# Altium PCB PCB2.PcbDoc
Units mil, origin at the board's own origin, x right, y up, seen from the top; angles counter-clockwise.
Board outline 1875 x 2875 mil, 2 copper layers (Top Layer, Bottom Layer); 23 components, 19 nets, 92 pads, 0 vias.
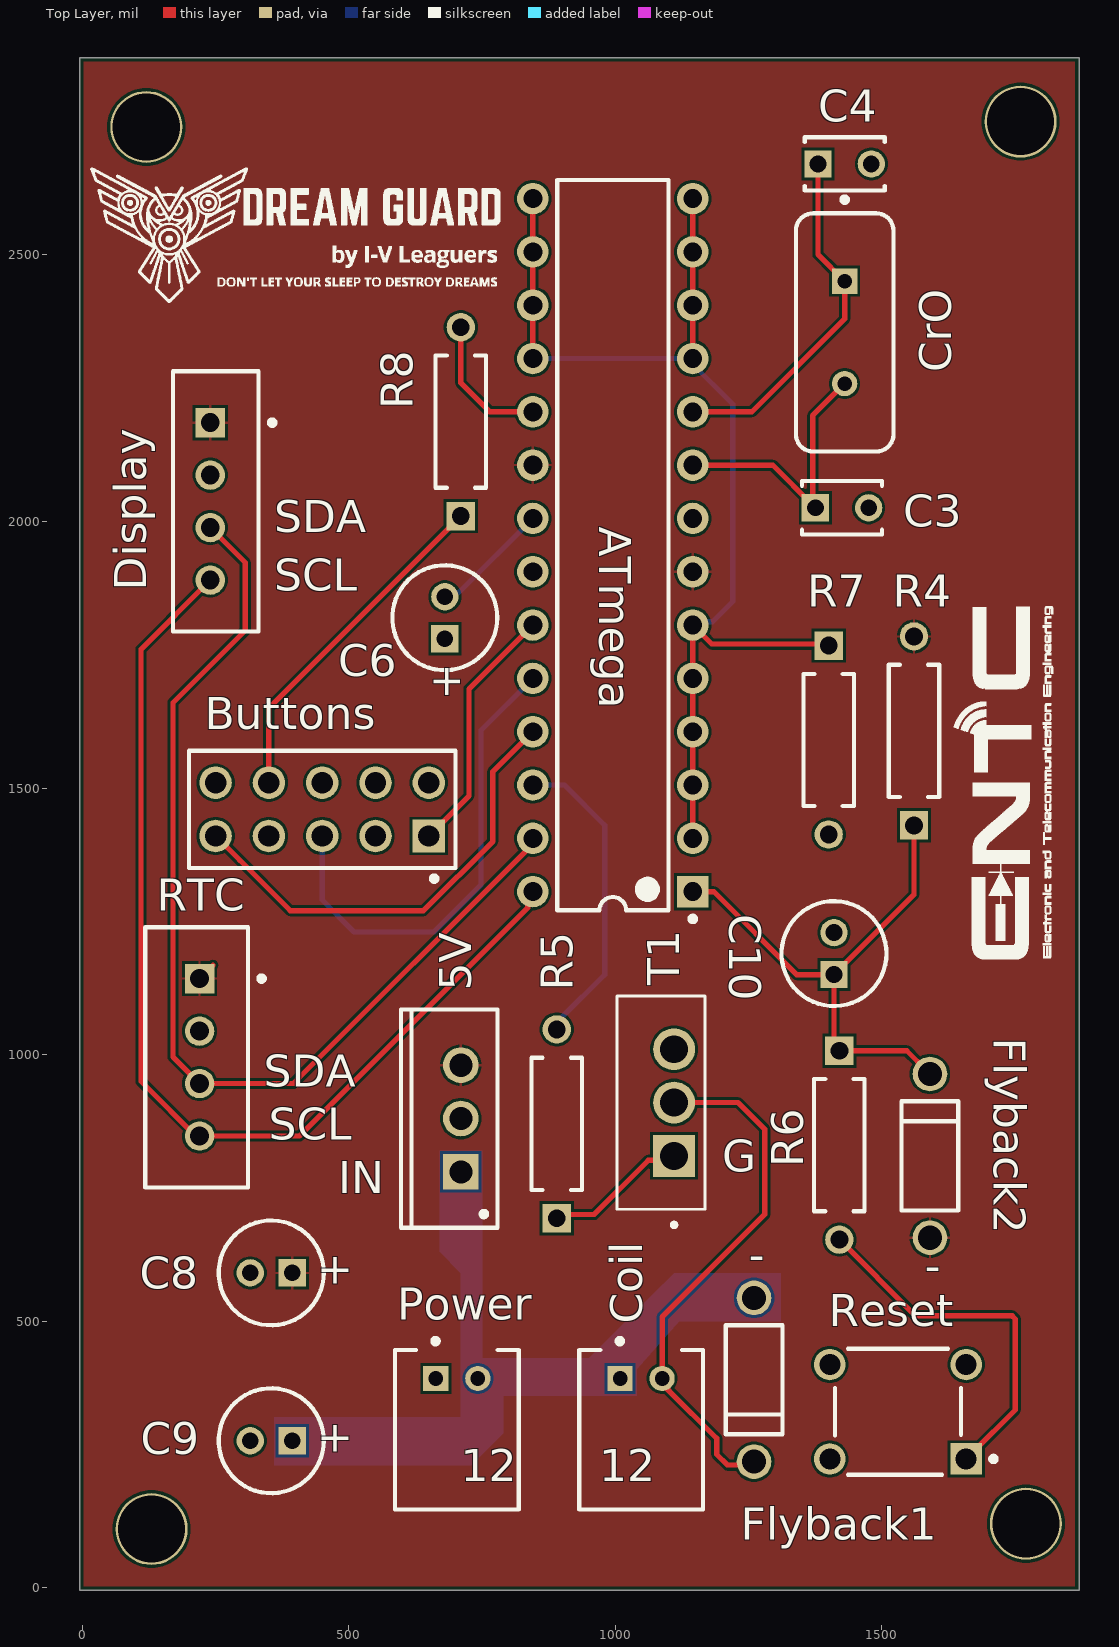
[diagram p0: Top Layer view]
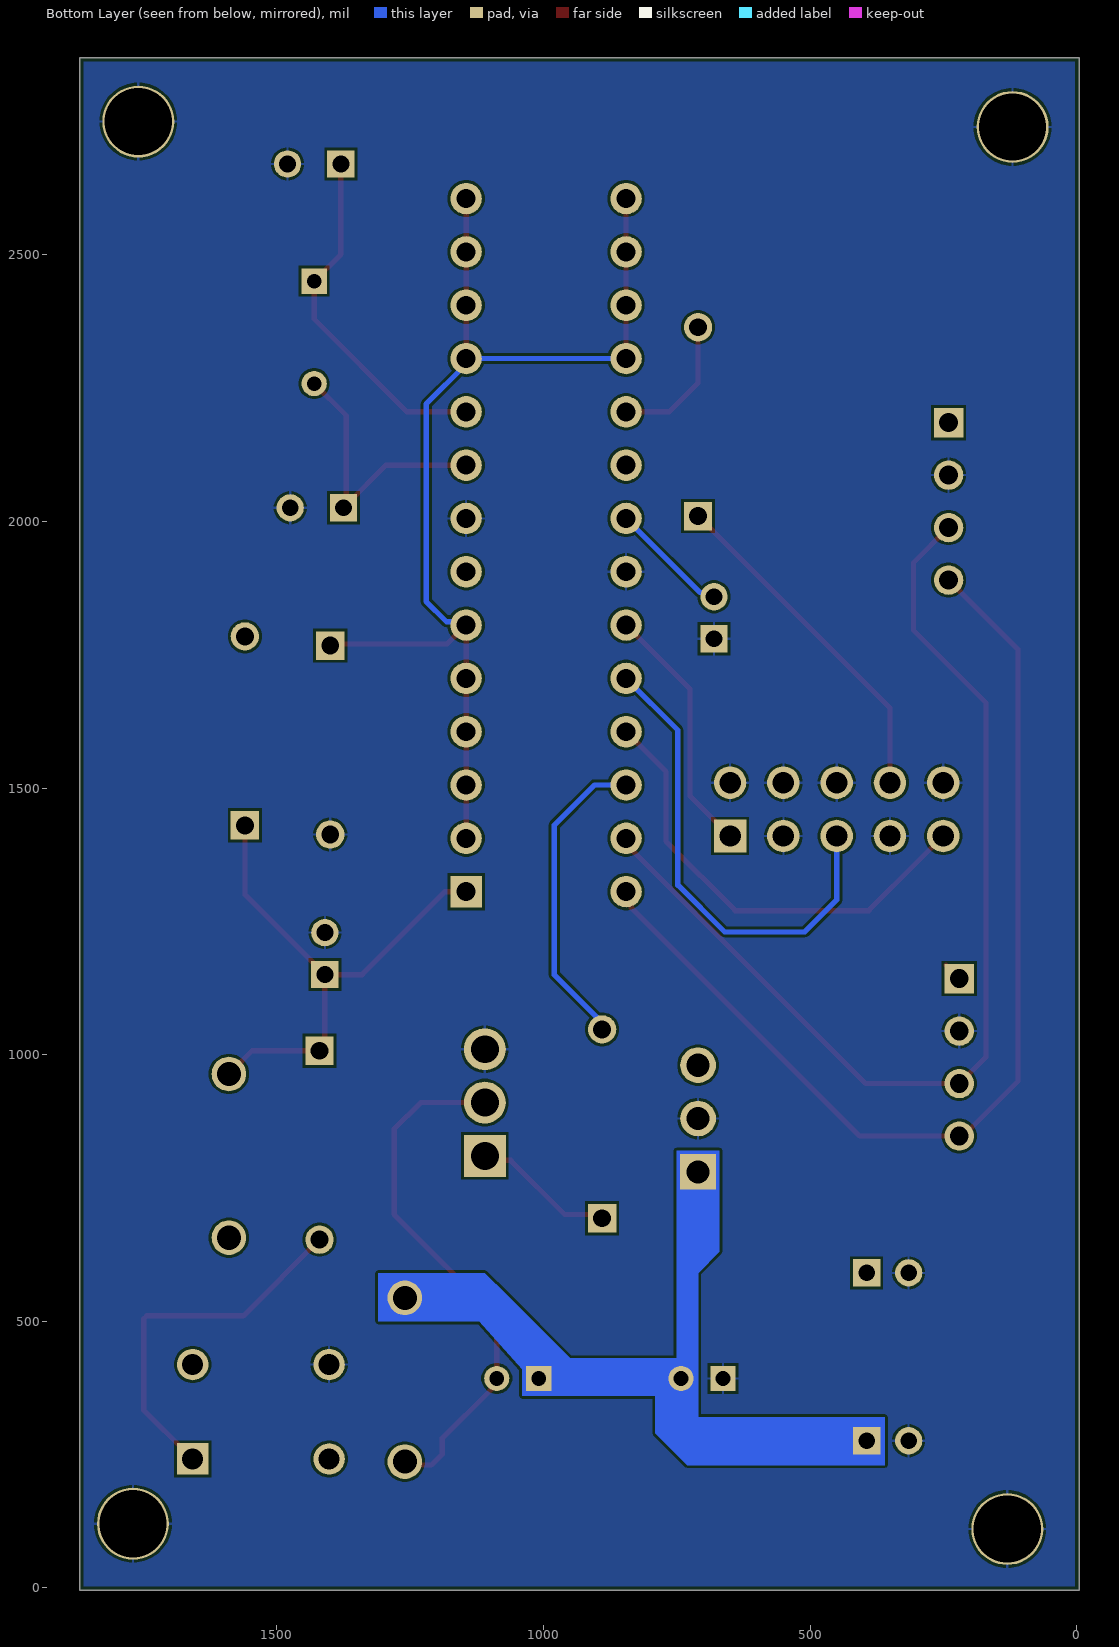
[diagram p1: Bottom Layer view, seen from below]

## Layer stack, top to bottom
Top Solder: solder mask 0.4, Solder Resist, Dk 3.5
Top Layer: signal copper 1.4
Dielectric 1: dielectric 12.6, FR-4, Dk 4.8
Bottom Layer: signal copper 1.4
Bottom Solder: solder mask 0.4, Solder Resist, Dk 3.5

## Board outline
-5,-5 1870,-5 1870,2870 -5,2870

## Design rules (kind name [scope] priority, off if disabled: settings)
BoardOutlineClearance [All] p1: gap=7.87 ignorepadtopadclearanceinfootprint=FALSE
Clearance [All] p1: gap=5 ignorepadtopadclearanceinfootprint=FALSE except(9.84: Arc-Hole Track-Hole SMDPad-Hole THPad-Hole Via-Hole Fill-Hole Poly-Hole Region-Hole Text-Hole)
ComponentClearance [All] p1: gap=5 collisioncheckmode=3 verticalgap=5 showdistances=TRUE
DiffPairsRouting [All] p1: maxlimit=10 minlimit=5 mostfreqgap=5 toplayer_minwidth=5 toplayer_maxwidth=1000 toplayer_prefwidth=5 bottomlayer_minwidth=5 bottomlayer_maxwidth=1000 bottomlayer_prefwidth=5 maxuncoupledlength=500
Height [All] p1: minheight=0 maxheight=71497.94 prefheight=500
HoleSize [All] p1: absolutevalues=TRUE maxlimit=248.03 minlimit=11.81 maxpercent=80.000 minpercent=20.000
HoleToHoleClearance [All] p1: gap=9.84 allowstackedmicrovias=FALSE
MinimumAnnularRing [All] p1: minimumring=3
MinimumSolderMaskSliver [All] p1: minsoldermaskwidth=0
PlaneClearance [All] p1: clearance=5
PlaneConnect PlaneConnectPowerPads [InPadClass('PowerPads')] p1: planeconnectstyle=Direct reliefexpansion=20 reliefentries=4 reliefconductorwidth=10 reliefairgap=10
PlaneConnect [All] p2: pad.planeconnectstyle=Relief pad.reliefexpansion=11.81 pad.reliefentries=4 pad.reliefconductorwidth=5 pad.reliefairgap=5 via.planeconnectstyle=Direct via.reliefexpansion=11.81 via.reliefentries=4 via.reliefconductorwidth=5 via.reliefairgap=5
PolygonConnect PolygonConnectPowerPads [All vs (InPadClass('PowerPads'))] p1: connectstyle=Direct reliefconductorwidth=10 reliefentries=4 polygonreliefangle="90 Angle" airgapwidth=10
PolygonConnect [All] p2: thpad.connectstyle=Relief thpad.reliefconductorwidth=5 thpad.reliefentries=4 thpad.polygonreliefangle="90 Angle" thpad.airgapwidth=5 smdpad.connectstyle=Relief smdpad.reliefconductorwidth=5 smdpad.reliefentries=4 smdpad.polygonreliefangle="90 Angle" smdpad.airgapwidth=5 via.connectstyle=Direct via.reliefconductorwidth=5 via.reliefentries=4 via.polygonreliefangle="90 Angle" via.airgapwidth=5
RoutingVias [All] p1: holewidth=11.81 width=23.62 viastyle="Through Hole" minholewidth=11.81 minwidth=23.62 maxholewidth=23.62 maxwidth=259.84
SilkToSilkClearance [All] p1: silktosilkclearance=0
SilkToSolderMaskClearance [IsPad] p1: minsilkscreentomaskgap=5 clearancetoexposedcopper=TRUE
SolderMaskExpansion [All] p1: expansion=2.95 istentingtop=FALSE
Width "Power 12" [InNet('+12')] p1: maxlimit=30 minlimit=10 preferedwidth=25
Width GND [InNet('GND')] p2: maxlimit=30 minlimit=10 preferedwidth=25
Width "Power 5" [InNet('+5')] p3: maxlimit=30 minlimit=10 preferedwidth=25
Width [All] p4: maxlimit=19.68 minlimit=10 preferedwidth=10 minimp=50.000000 maximp=50.000000 favimp=50.000000
20 further rules are at their usual default settings.

## Components (designator, comment, footprint, x,y, rotation, side; value= is the part's Value field where it differs from the comment)
5V "L7805CV" TO220 710,880 r90 top
ATmega "ATMEGA328P-PU" ATML-28P3 995.04,1955.63 r180 top
Buttons "68021-210HLF" FCI-68021-210HLF-10_V 450,1460 r180 top
C3 "22pF" KEMT-C315-THT-2 1425.04,2025.63 r0 top
C4 "22pF" KEMT-C315-THT-2 1430.04,2670.63 r0 top
C6 "ECA1HM100" CAPPR55-200-1100X500X1200 680,1819.37 r90 top value=10µF
C8 "ECA1HM100" CAPPR55-200-1100X500X1200 354.33,590.55 r180 top value=10µF
C9 "ECA1HM100" CAPPR55-200-1100X500X1200 354.33,275.59 r180 top value=10µF
C10 "ECA1HM100" CAPPR55-200-1100X500X1200 1410,1189.37 r90 top value=10µF
Coil "S2B-PH-K-S(LF)(SN)" JST-S2B-PH-K-S_V 1048.24,296.03 r0 top
CrO "FOXSLF/160-20" FOX-FOXSLF160-20 1430.04,2354.57 r270 top
Display "S4B-XH-A(LF)(SN)" JST-S4B-XH-A(LF)(SN)_V 240,2037.64 r270 top
Flyback1 "1N4007" FAIR-DO-41-2 1260,390 r270 top
Flyback2 "1N4007" FAIR-DO-41-2 1590,810 r90 top
Power "S2B-PH-K-S(LF)(SN)" JST-S2B-PH-K-S_V 702.5,296.03 r0 top
R4 "MFR-25FBF52-10K" RESA60-630X240 1560,1607.17 r90 top value=10k
R5 "MFR-25FBF52-1K" RESA60-630X240 890,870 r90 top value=1k
R6 "MFR-25FBF52-221R" RESA60-630X240 1420,830 r270 top value=221
R7 "MFR-25FBF52-10K" RESA60-630X240 1400,1590 r270 top value=10k
R8 "MFR-25FBF52-221R" RESA60-630X240 710,2187.17 r90 top value=221
Reset "B3F-1000" OMRON-B3F-1000-4_V 1530,330 r180 top
RTC "S4B-XH-A(LF)(SN)" JST-S4B-XH-A(LF)(SN)_V 220.04,994.84 r270 top
T1 "IRFZ44N" TO254P1016X419X2286-3 1110,910 r90 top

## Footprints (in the part's own frame and the unit in brackets; to place one, negate y for a bottom-side part, rotate by r counter-clockwise, add the part's x,y. Pads: shape width x height; smd on the part's side, far side on the other; paste and mask are expansions set on the pad)
ATML-28P3 [mm] "DIP, 28-Leads, Body 34.8x7.2mm, Pitch 2.54mm"
  rect 1.5x1.5 hole 0.9: 1(-3.81,16.51)
  round 1.5 hole 0.9: 2(-3.81,13.97) 3(-3.81,11.43) 4(-3.81,8.89) 5(-3.81,6.35) 6(-3.81,3.81) 7(-3.81,1.27) 8(-3.81,-1.27) 9(-3.81,-3.81) 10(-3.81,-6.35) 11(-3.81,-8.89) 12(-3.81,-11.43) 13(-3.81,-13.97) 14(-3.81,-16.51) 15(3.81,-16.51) 16(3.81,-13.97) 17(3.81,-11.43) 18(3.81,-8.89) 19(3.81,-6.35) 20(3.81,-3.81) 21(3.81,-1.27) 22(3.81,1.27) 23(3.81,3.81) 24(3.81,6.35) 25(3.81,8.89) 26(3.81,11.43) 27(3.81,13.97) 28(3.81,16.51)
  silkscreen extent -3.94,-17.4 2.65,17.93, body extent -3.95,-17.4 3.95,17.4, height 4.58
CAPPR55-200-1100X500X1200 [mm] "THD, 2-Leads, Dia 5mm, Pin Spacing 2mm"
  rect 1.3x1.3 hole 0.8: 1(-1,0)
  round 1.3 hole 0.8: 2(1,0)
  silkscreen extent -2.5,-2.5 2.5,2.5, body extent -2.5,-2.5 2.45,2.5, height 12
FAIR-DO-41-2 [mm] "THD, 2-Leads, Body 5.2x2.72mm, Pin Spacing 7.8mm"
  round 1.65 hole 1.15: 1(-3.9,0) 2(3.9,0)
  silkscreen extent -2.6,-1.35 2.6,1.35, body extent -4.29,-1.17 4.29,1.17, height 2.35
FCI-68021-210HLF-10_V [mm] "THD, 10-Leads, Body 12.7x2.54mm, Pitch 2.54mm"
  rect 1.55x1.55 hole 1.02: 1(-5.08,1.27)
  round 1.55 hole 1.02: 2(-2.54,1.27) 3(0,1.27) 4(2.54,1.27) 5(5.08,1.27) 6(5.08,-1.27) 7(2.54,-1.27) 8(0,-1.27) 9(-2.54,-1.27) 10(-5.08,-1.27)
  silkscreen extent -6.35,-2.79 6.35,3.43, body extent -6.32,-2.79 6.32,2.79, height 0.25
FOX-FOXSLF160-20 [mm] "THD, 2-Leads, Body 11.35x4.65mm"
  rect 1.2x1.2 hole 0.7: 1(-2.44,0)
  round 1.2 hole 0.7: 2(2.44,0)
  silkscreen extent -6.45,-2.33 5.68,2.33, body extent -5.67,-2.32 5.68,2.33, height 3.6
JST-S2B-PH-K-S_V [mm] "THD, 2-Leads, Body 7.6x5.9mm, Pitch 2mm"
  rect 1.2x1.2 hole 0.7: 1(-1,2.45)
  round 1.2 hole 0.7: 2(1,2.45)
  silkscreen extent -2.95,-3.8 2.95,4.35, body extent -2.95,-3.8 2.95,3.8, height 4.8
JST-S4B-XH-A(LF)(SN)_V [mm] "Header, 4-Leads, Body 12.4x11.5mm, Pitch 2.5mm"
  rect 1.4x1.4 hole 0.9: 1(-3.75,0)
  round 1.4 hole 0.9: 2(-1.25,0) 3(1.25,0) 4(3.75,0)
  silkscreen extent -6.2,-1.78 6.2,3.08, body extent -6.2,-1.78 6.2,2.3, height 0.25
KEMT-C315-THT-2 [mm] "THD, 2-Leads, Body 3.81x2.54mm"
  rect 1.3x1.3 hole 0.8: 1(-1.27,0)
  round 1.3 hole 0.8: 2(1.27,0)
  silkscreen extent -1.91,-1.27 1.91,1.27, body extent -1.91,-1.27 1.91,1.27, height 4.66
OMRON-B3F-1000-4_V [mm] "TH, 4-Leads, Body 6x6mm"
  rect 1.5x1.5 hole 1 paste+0: 1(-3.25,2.25)
  round 1.5 hole 1 paste+0: 2(3.25,2.25) 4(3.25,-2.25)
  round 1.5 hole 1 paste+0 mask+0.102: 3(-3.25,-2.25)
  silkscreen extent -4.68,-3 3,3, body extent -3.4,-3 3.4,3, height 4.5
RESA60-630X240 [mm] "Axial Resistor, 2-Leads, Dia 2.4mm, Body Length 6.3mm"
  rect 1.35x1.35 hole 0.85: 1(-4.5,0)
  round 1.35 hole 0.85: 2(4.5,0)
  silkscreen extent -3.15,-1.2 3.15,1.2, body extent -4.77,-1.19 4.77,1.2, height 2.4
TO220 [mm] "TO, Thru-Hole, Vertical, Heatsink Mounted; 3 In-Line Leads; Pitch 2.54 mm"
  rect 1.7x1.7 hole 1.1: 1(-2.54,0)
  round 1.7 hole 1.1: 2(0,0) 3(2.54,0)
  silkscreen extent -5.2,-1.75 5.2,2.85, body extent -5.25,-1.8 5.25,2.9, height 19.7
TO254P1016X419X2286-3 [mm]
  rect 1.995x1.995 / inner round 1.995 / far side rect 1.995x1.995 hole 1.33: 1(-2.54,0)
  round 1.995 hole 1.33: 2(0,0) 3(2.54,0)
  silkscreen extent -5.93,-1.48 5.08,2.72, body extent -5.08,-1.47 5.08,2.72, height 22.86

## Part data
5V: library part CMP-019-00018-3, "Positive Voltage Regulator IC, 1.5 A, 5 V, 0 to 125 degC, 3-Pin TO-220, RoHS, Tube", Case/Package=TO-220, Dropout Voltage=2V, Manufacturer=STMicroelectronics, Max Input Voltage=35V, Max Operating Temperature=125°C, Max Ouput Current=1.5A, Max Supply Voltage=20V, Min Input Voltage=7V, Min Operating Temperature=0°C, Min Supply Voltage=8V, Nominal Output Voltage=5V, Package Quantity=50, Datasheet URL=https://datasheet.ciiva.com/15111/getdatasheetpartid-44136-15111027.pdf, Datasheet Version="Rev 30, 09/2012", Manufacturer URL=http://www.st.com/, Mounting Technology=TH, Output Current=1.5A, Output Voltage=5V, Outputs=1, Packaging=Rail/Tube, Pins=3, RoHS Compliant=True
ATmega: library part CMP-020-00004-3, "8-Bit Microcontroller with 32 KBytes In-System Programmable Flash, 23 I/Os, -40 to 85 degC, 28-Pin PDIP (28P3), RoHS, Tube", Case/Package=DIP, Manufacturer=Atmel, Max Clock Frequency=20MHz, Max Operating Temperature=85°C, Max Supply Voltage=5.5V, Min Operating Temperature=-40°C, Min Supply Voltage=1.8V, Package Description="28-Pin Plastic Dual Inline Package, Body 34.671 x 7.3025 mm, Pitch 2.54 mm", Package Quantity=14, Package Reference=28P3, Package Version="Rev. B, 09/2001", Datasheet URL=http://www.atmel.com/images/Atmel-8271-8-bit-AVR-Microcontroller-ATmega48A-48PA-88A-88PA-168A-168PA-328-328P_datasheet_Complete.pdf, Datasheet Version="Rev. 8271J, 11/2015", Density=32KB, Ethernet Channels=0, I/Os=23, Interface=USART, Manufacturer URL=http://www.atmel.com/, Mounting Technology=TH, Package URL=http://www.atmel.com/images/Atmel-8271-8-bit-AVR-Microcontroller-ATmega48A-48PA-88A-88PA-168A-168PA-328-328P_datasheet_Complete.pdf, Packaging=Rail/Tube, Pins=28, RAM Size=2KB, RoHS Compliant=True
Buttons: library part CMP-002-00020-2, "Male Header, Pitch 2.54 mm, 2 x 5 Position, Height 4.83 mm, Tail Length 3.05 mm, Bulk", Case/Package=68021-210HLF-10, Manufacturer="FCI Electronics", Package Description="Male Header, Pitch 2.54 mm, 2 x 5 Position, Height 4.83 mm, Tail Length 3.05 mm", Connector Type=Header, Datasheet URL=http://portal.fciconnect.com/Comergent//fci/drawing/68020.pdf, Datasheet Version="Rev. BM, 04/2015", Gender=Male, Manufacturer URL=http://portal.fciconnect.com/, Mounting Technology=TH, Package Reference=68021-210HLF-10, RoHS Compliant=Unknown
C3 C4: library part CMP-1664-00008-1, "Capacitor, Ceramic, 22 pF, +/-10 %, 100 V, -55 to 125 degC, 2-Pin THD, RoHS, Bulk", Case\Package=TO-220, Max Input Voltage="40 V", Max Operating Temperature="125 degC", Max Ouput Current="1.5 A", Min Input Voltage="4.2 V", Min Operating Temperature="0 degC", Output Voltage="1.2 V", Package Quantity=50, ComponentLink1Description="Manufacturer URL", ComponentLink1URL=http://www.kemet.com/, ComponentLink2Description=Datasheet, ComponentLink2URL=http://capacitoredge.kemet.com/capedge2/DataSheet/Datasheet-C315C220K1G5TA.pdf?pn=C315C220K1G5TA{BULK}, DatasheetVersion=Aug-16, Height="9.28 mm", Length="10.28 mm", Mount="Through Hole", Output Current="1.5 A", Outputs=1, PackageDescription="2-Pin Through Hole Device, Body 3.81 x 2.54 mm", PackageReference=C315-THT-2, Packaging=Rail/Tube, Pins=3, Radiation Hardening=No, REACH SVHC="No SVHC", RoHSCompliant=true, Weight="0.08113 oz", Width="4.82 mm"
C6 C8 C9 C10: library part CMP-001-00025-7, "Aluminum Electrolytic Capacitor, 10 uF, +/- 20%, 50 V, -40 to 85 degC, 2-Pin THD, RoHS, Bulk", Capacitor Type=Electrolytic, Case/Package=Radial, Manufacturer=Panasonic, Max Operating Temperature=85°C, Min Operating Temperature=-40°C, Package Description="2-Pin Radial Lead, Dia 5 mm, Height 12 mm", Package Quantity=200, Package Reference=CAPPR55-200-1100X500X1200, Ripple Current=65mA, Tolerance=20%, Voltage Rating=50V, Datasheet URL=https://industrial.panasonic.com/cdbs/www-data/pdf/RDF0000/ABA0000C1218.pdf, Datasheet Version="Rev. 05, 10/2016", Diameter=5mm, Lead Pitch=2mm, Manufacturer URL=http://www.panasonic.com/, Mounting Technology=TH, Packaging=Bulk, Pins=2, Ripple Current (AC)=65mA, RoHS Compliant=True
Coil Power: library part CMP-002-00030-2, "Male Header, Pitch 2 mm, 1 x 2 Position, Height 4.8 mm, Tail Length 3.4 mm, -25 to 85 degC, RoHS, Bulk", Case/Package=S2B-PH-K-S, Manufacturer="Japan Solderless Terminals", Max Operating Temperature=85°C, Min Operating Temperature=-25°C, Package Description="Male Header, Pitch 2 mm, 1 x 2 Position, Height 4.8 mm, Tail Length 3.4 mm", Connector Type=Header, Datasheet URL=http://www.jst-mfg.com/product/pdf/eng/ePH.pdf, Datasheet Version=Dec-12, Gender=Male, Mounting Technology=SM, Package Reference=S2B-PH-K-S, RoHS Compliant=Unknown
CrO: library part CMP-1749-00003-1, "Resistance Weld Thru-Hole Crystal, 16 MHz, -20 to 70 degC, 2-Pin THD, RoHS, Bulk", Case\Package=Axial, Max Operating Temperature="155 degC", Min Operating Temperature="-55 degC", Package Quantity=200, Power Rating="250 mW", Resistance="221 kohm", Tolerance=1%, Voltage Rating="250 V", ComponentLink1Description="Manufacturer URL", ComponentLink1URL=http://www.foxonline.com/, ComponentLink2Description=Datasheet, ComponentLink2URL=http://www.foxonline.com/pdfs/hc49slf.pdf, DatasheetVersion=Mar-15, Length="0.248 inch", Mount="Through Hole", PackageDescription="2-Pin Through Hole Device, Body 11.35 x 4.65 mm", PackageReference=FOXSLF160-20, Packaging=Bulk, RoHSCompliant=true
Display RTC: library part CMP-002-00034-2, "Male Header, Pitch 2.5 mm, 1 x 4 Position, Height 6.1 mm, Tail Length 3.4 mm, -25 to 85 degC, RoHS, Bulk", Manufacturer=JST, Max Operating Temperature=85°C, Min Operating Temperature=-25°C, Package Description="XH Series Disconnectable Crimp Style Connector, Pitch 2.5 mm, 1 x 4 Position, Height 6.1 mm, Tail Length 3.4 mm", Case/Package=S4B-XH-A(LF)(SN), Connector Type=Header, Datasheet URL=http://www.jst-mfg.com/product/pdf/eng/eXH.pdf, Datasheet Version=May-16, Gender=Male, Manufacturer URL=http://www.jst.com/home2.html, Mounting Technology=TH, Package Reference=S4B-XH-A(LF)(SN), RoHS Compliant=Unknown
Flyback1 Flyback2: library part CMP-004-00007-2, "General Purpose Rectifier, 1.1 V, 1.0 A, -55 to 175 degC, 2-Pin DO-41, RoHS, Tape and Reel", Case/Package=DO-41-2, Forward Current=1A, Forward Voltage=1.1V, Manufacturer=Fairchild, Max Operating Temperature=175°C, Max Surge Current=30A, Min Operating Temperature=-55°C, Package Description="2-Pin Axial Lead, Dia 2.375 mm, Body Length 4.63 mm", Package Quantity=5000, Package Version="Rev. 2, 09/2008", Peak Reverse Current=5uA, Datasheet URL=https://www.fairchildsemi.com/datasheets/1N/1N4007.pdf, Datasheet Version="Rev. 1.1.0, 11/2014", Elements=1, Manufacturer URL=https://www.fairchildsemi.com/, Mounting Technology=TH, Package Reference=DO-41-2, Package URL=http://www.fairchildsemi.com/dwg/DO/DO41A.pdf, Packaging=TapeandReel, Pins=2, RoHS Compliant=True
R4 R7: library part CMP-009-00047-4, "Axial Resistor, 10 KOhm, +/- 1%, 0.25 W, -55 to 155 degC, 2-Pin THD, RoHS, Bulk", Case/Package=Axial, Manufacturer=Yageo, Max Operating Temperature=155°C, Min Operating Temperature=-55°C, Package Description="2-Pin Axial Lead, Dia 2.4 mm, Body Length 6.3 mm", Package Quantity=200, Package Reference=MFR-25, Power=250mW, Tolerance=1%, Voltage Rating=250V, Datasheet URL=http://www.yageo.com/documents/recent/Yageo%20LR_MFR_2013.pdf, Datasheet Version=Apr-13, Manufacturer URL=http://www.yageo.com/, Mounting Technology=TH, Packaging=Bulk, RoHS Compliant=True
R5: library part CMP-009-00048-4, "Axial Resistor, 1 KOhm, +/- 1%, 250 mW, -55 to 155 degC, 2-Pin THD, RoHS, Bulk", Case/Package=Axial, Manufacturer=Yageo, Max Operating Temperature=155°C, Min Operating Temperature=-55°C, Package Description="2-Pin Axial Lead, Dia 2.4 mm, Body Length 6.3 mm", Package Quantity=200, Package Reference=MFR-25, Power=250mW, Tolerance=1%, Voltage Rating=250V, Composition=CarbonFilm, Datasheet URL=http://www.yageo.com/documents/recent/Yageo%20LR_MFR_2013.pdf, Datasheet Version=Apr-13, Manufacturer URL=http://www.yageo.com/, Mounting Technology=TH, Packaging=Bulk, RoHS Compliant=True
R6 R8: library part CMP-009-00051-4, "Axial Resistor, 221 Ohm, +/- 1%, 250 mW, -55 to 155 degC, 2-Pin THD, RoHS, Bulk", Case/Package=Axial, Manufacturer=Yageo, Max Operating Temperature=155°C, Min Operating Temperature=-55°C, Package Description="2-Pin Axial Lead, Dia 2.4 mm, Body Length 6.3 mm", Package Quantity=200, Package Reference=MFR-25, Power=250mW, Tolerance=1%, Voltage Rating=250V, Datasheet URL=http://www.yageo.com/documents/recent/Yageo%20LR_MFR_2013.pdf, Datasheet Version=Apr-13, Manufacturer URL=http://www.yageo.com/, Mounting Technology=TH, Packaging=Bulk, RoHS Compliant=True
Reset: library part CMP-011-00004-2, "Tactile Switch, SPST-NO, 0.05 A, 24 V, -25 to 70 degC, 4-Pin THD, RoHS, Bulk", Contact Current Rating=50mA, Manufacturer="Omron Electronic Components", Max Contact Resistance=100mohm, Max Operating Temperature=70°C, Max Voltage Rating (DC)=24V, Min Operating Temperature=-25°C, Operating Force=100gf, Package Description="4-Pin Through Hole Device, Body 6 x 6 mm", Package Quantity=1500, Resistance=0.1Ohm, Case/Package=B3F-1000, Contact Material=Gold, Contact Plating=Gold, Current Rating=50mA, Datasheet URL=http://www.omron.com/ecb/products/pdf/en-b3f.pdf, Datasheet Version=Jan-15, Manufacturer URL=http://www.omron.com/, Max Current Rating=50mA, Mounting Technology=TH, Package Reference=B3F-1000, Packaging=Bulk, Pins=4, RoHS Compliant=True, Throw Configuration=SPST, Voltage Rating=24V, Voltage Rating (DC)=24V
T1: library part CMP-005-000000-1, "N-Channel 55 V 49A (Tc) 94W (Tc) Through Hole TO-220AB", Package="TO-220-3 Infineon", Availability="In Stock", Check_prices=https://www.snapeda.com/parts/IRFZ44N/Infineon+Technologies/view-part/?ref=eda, Component Type=Standard, Design Item ID=IRFZ44N, MF="Infineon Technologies", MP=IRFZ44N, Pin Count=3, Price=None, Purchase-URL=https://pricing.snapeda.com/search/part/IRFZ44N/?ref=eda, SnapEDA_Link=https://www.snapeda.com/parts/IRFZ44N/Infineon+Technologies/view-part/?ref=snap, Source=IRFZ44N.SchLib

## Free pads (board coordinates)
  round 135 hole 125.98: 1(120,2740) 2(1760,2750) 3(1770,120) 4(130,110)

## Nets (pads, with @x,y where several pads share a name; then routed paths per layer and width w, separated by ;. In a path a pad name is that pad's centre, name@x,y a point inside that pad or via, vN(x,y) a via of type N, cw(c..) or ccw(c..) an arc to the next point about the centre after c; other vN are vias at no path point)
+5: 5V.3 ATmega.7 ATmega.20 C8.1 Display.1 Flyback2.1 R4.2 RTC.1 | length 79.2
  Top Layer w10: RTC.1 RTC.1@245.04,1167.48
  Bottom Layer w25: RTC.1@204.98,1157.54 RTC.1 ; ATmega.7 ATmega.7@1154.25,1905.63 ; R4.2@1560,1776.72 1560,1787.17 R4.2@1562.83,1787.17
+12: 5V.1 C9.1 Coil.1 Flyback1.1 Power.2 | length 4.1
  Top Layer w25: Power.2@738.96,389.58 Power.2
Alarm: ATmega.25 Buttons.5 | length 868.6
  Top Layer w10: Buttons.5 295.51,1364.49 390,1270 640,1270 770,1400 770,1530.59 ATmega.25
"Control Signal": ATmega.26 R5.2 | length 588.4
  Bottom Layer w10: ATmega.26 904.37,1505.63 980,1430 980,1150 898.26,1068.26 898.26,1067.1 881.16,1050 R5.2@880,1050
GND: 5V.2 ATmega.8 ATmega.22 Buttons.2 Buttons.4 Buttons.6 Buttons.8 Buttons.9 Buttons.10 C3.2 C4.2 C6.1 C8.2 C9.2 C10.2 Display.2 pad.1 pad.2 pad.3 pad.4 Power.1 R7.2 Reset.4 RTC.2 T1.3 | length 22
  Top Layer w10: Power.1@655.04,400.58 Power.1
  Bottom Layer w25: Power.1@660.64,390 Power.1 ; C10.2@1404.99,1223.73 C10.2
Hours: ATmega.23 Buttons.1 | length 487
  Top Layer w10: Buttons.1@650,1400 Buttons.1 725.21,1485.21 725.21,1685.8 ATmega.23 ATmega.23@845.47,1805.2
LED: Buttons.7 R8.1 | length 649.1
  Top Layer w10: Buttons.7 350,1650 R8.1
Minutes: ATmega.24 Buttons.3 | length 917.7
  Top Layer w10: ATmega.24 ATmega.24@855.63,1705.63
  Bottom Layer w10: Buttons.3 450,1290 510,1230 660,1230 747.83,1317.83 747.83,1608.42 ATmega.24
NetATmega_2: ATmega.2 ATmega.3 ATmega.4 ATmega.5 ATmega.6 ATmega.11 ATmega.12 ATmega.13 ATmega.14 ATmega.15 ATmega.16 ATmega.17 ATmega.18 R7.1 | length 2139.2
  Top Layer w10: ATmega.18 ATmega.17 ATmega.16 ATmega.15 ; ATmega.3@1140.33,1510.33 1145.04,1515.04 ATmega.4 ; ATmega.3 1145.04,1414.96 ATmega.2@1150,1410 ; ATmega.5 1145.04,1614.96 ATmega.4@1149.7,1610.3 ; ATmega.11 ATmega.12 ATmega.13 ATmega.14 ; ATmega.5@1149.7,1710.3 1145.04,1714.96 ATmega.6 1180.67,1770 R7.1@1400,1770
  Bottom Layer w10: ATmega.18 ATmega.11 1145.04,2294.96 1220,2220 1220,1850 1181.82,1811.82 1151.23,1811.82 ATmega.6
NetATmega_9: ATmega.9 C3.1 CrO.2 | length 519
  Top Layer w10: ATmega.9 1295.04,2105.63 C3.1@1370,2030.67 ; C3.1@1380,2030 1370.67,2030 C3.1@1370,2030.67 ; CrO.2 1370,2198.46 C3.1@1370,2030.67
NetATmega_10: ATmega.10 C4.1 CrO.1 | length 667.3
  Top Layer w10: ATmega.10 1255.63,2205.63 1430,2380 CrO.1@1430,2450 ; C4.1@1380,2670 1380,2500.67 CrO.1
NetATmega_21: ATmega.21 C6.2 | length 244.2
  Top Layer w10: C6.2@674.96,1868.74 C6.2@684.96,1858.74
  Bottom Layer w10: C6.2@680,1860 686.62,1866.62 706.03,1866.62 ATmega.21 ATmega.21@840.33,2005.63
NetCoil_2: Coil.2 Flyback1.2 T1.2 | length 1002.1
  Top Layer w10: Coil.2@1087.61,390 1087.61,382.41 1099.87,370.15 1190,280 1190,250 1210,230 Flyback1.2@1260,230 ; Coil.2@1090,390 1087.61,392.39 Coil.2 1087.61,507.61 1280,700 1280,860 1230,910 T1.2
NetR5_1: R5.1 T1.1 | length 268.5
  Top Layer w10: R5.1 897.16,700 960,700 1061.59,801.59 1101.59,801.59 T1.1
NetR6_2: R6.2 Reset.1 | length 698.9
  Top Layer w10: R6.2 1562.84,510 1744.14,510 1750,504.14 1750,333.46 1670,253.46 Reset.1@1670,230
On: ATmega.19 R8.2 | length 273.6
  Top Layer w10: R8.2@710,2360 R8.2@718.26,2351.74 ; R8.2 710,2260 764.37,2205.63 ATmega.19
Reset: ATmega.1 C10.1 Flyback2.2 R4.1 R6.1 | length 1001.1
  Top Layer w10: ATmega.1 1184.37,1305.63 1340,1150 C10.1 ; R6.1 1546.38,1007.17 1583.54,970 Flyback2.2@1590,970 ; R6.1@1420,1010 1410,1020 C10.1 ; R4.1 1560,1300 C10.1
SCL: ATmega.28 Display.4 RTC.4 | length 1976.4
  Top Layer w10: RTC.4@220,840 110,950 110,1760 Display.4 ; RTC.4 407.2,847.2 835.65,1275.65 835.65,1296.24 ATmega.28
SDA: ATmega.27 Display.3 RTC.3 | length 1968.8
  Top Layer w10: Display.3 305.86,1922.57 305.86,1795.86 170,1660 170,995.67 RTC.3 395.63,945.63 845.04,1395.04 ATmega.27
pads on no net: Reset.2 Reset.3

## Polygon pours and split planes (outlines as drawn)
GND on Bottom Layer "GND" (solid, remove dead copper, pour order 1): -5,-5 1870,-5 1870,2870 -5,2870
+5 on Top Layer "5V" (solid, remove dead copper, pour order 0): -5,-5 1870,-5 1870,2870 -5,2870

## Other copper
Bottom Layer:
  region net +12: 670,820 670,630 710,590 710,320 360,320 360,230 730,230 790,290 790,360 1040,360 1040,410 1120,500 1310,500 1310,590 1110,590 1070,550 950,430 750,430 750,820

## Silkscreen, mask and mechanical layers (free items; w line width, h text height)
Top Overlay:
  drawing of 115 lines, arcs and shapes, not listed
  text "SDA" at 360,1980 h60
  text "SCL" at 360,1870 h60
  text "SDA" at 340,940 h60
  text "SCL" at 350,840 h60
  text "G" at 1200,780 h60
  text "IN" at 480,740 h60
  text "-" at 1279.99,639.99 h60 r180
  text "-" at 1609.99,619.99 h60 r180
  text "12" at 710,200 h60
  text "12" at 970,200 h60
Mechanical 13:
  lines w10: 0,0 1870,0 1870,2870 0,2870 0,0

## Text inside footprints (layer, text, board x,y; h text height)
C6: Top Overlay "+" at 709.02,1665.51 h59.06 r90
C8: Top Overlay "+" at 508.19,619.57 h59.06 r180
C9: Top Overlay "+" at 508.19,304.61 h59.06 r180